# Altium PCB FS001.PcbDoc
Units mm, origin at the board's own origin, x right, y up, seen from the top; angles counter-clockwise.
Board outline 64 x 10 mm, 2 copper layers (Top Layer, Bottom Layer), stack 1.57 mm thick; 34 components, 35 nets, 134 pads, 15 vias.
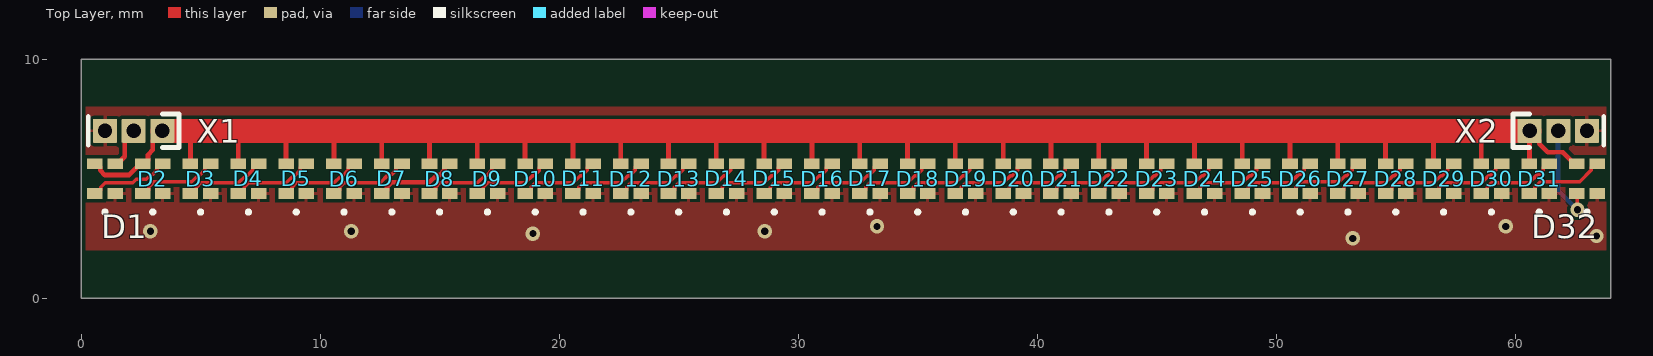
[diagram p0: Top Layer view]
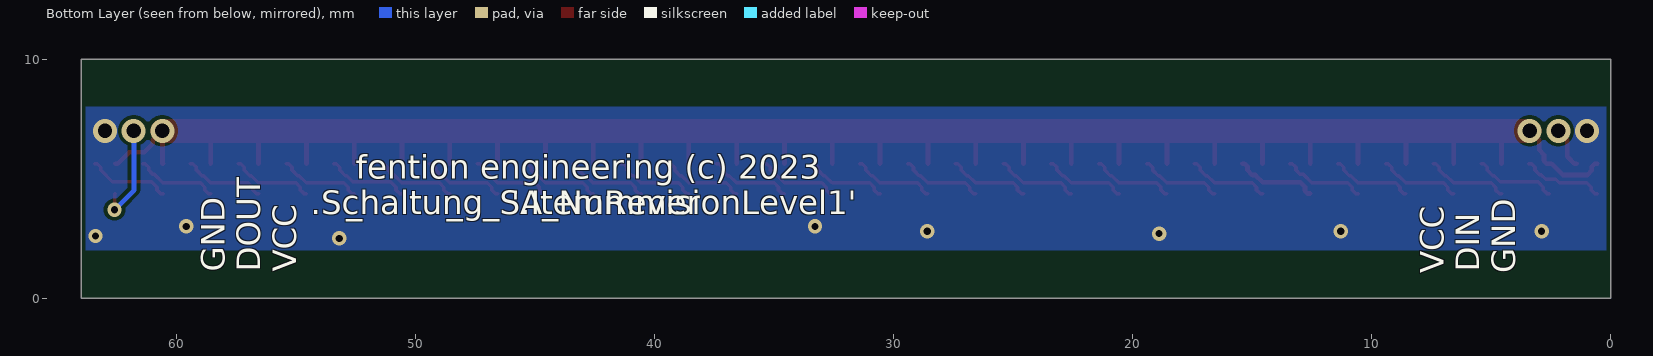
[diagram p1: Bottom Layer view, seen from below]
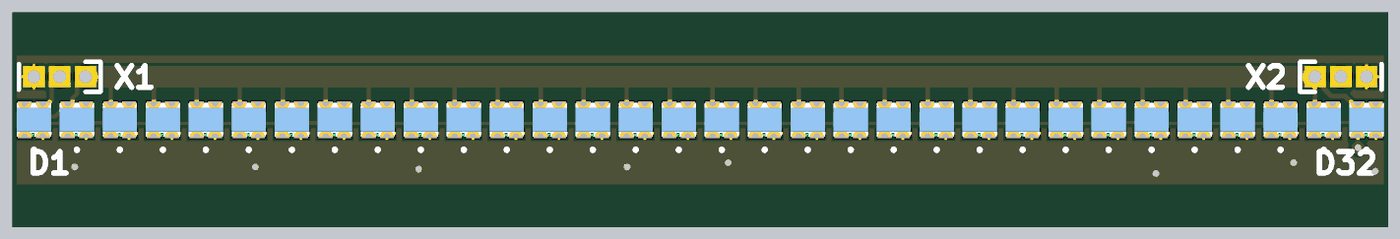
[diagram p2: 3D render of the assembled board from above, using the file's embedded part models]

## Layer stack, top to bottom
Top Solder: solder mask 0.0127, Solder Resist, Dk 3.8
Top Layer: signal copper 0.035
Dielectric: core 1.5, FR-4, Dk 4.5
Bottom Layer: signal copper 0.035
Bottom Solder: solder mask 0.0127, Solder Resist, Dk 3.8

## Board outline
0,10 64,10 64,0 0,0

## Design rules (kind name [scope] priority, off if disabled: settings)
BoardOutlineClearance [All] p1: gap=0.2 ignorepadtopadclearanceinfootprint=FALSE
Clearance [All] p1: gap=0.15 ignorepadtopadclearanceinfootprint=FALSE
ComponentClearance [All] p1: gap=0.127 collisioncheckmode=3 verticalgap=0.127 showdistances=TRUE
DiffPairsRouting [All] p1: maxlimit=0.254 minlimit=0.127 mostfreqgap=0.127 toplayer_minwidth=0.127 toplayer_maxwidth=25.4 toplayer_prefwidth=0.127 bottomlayer_minwidth=0.127 bottomlayer_maxwidth=25.4 bottomlayer_prefwidth=0.127 maxuncoupledlength=12.7
Height [All] p1: minheight=0 maxheight=1816.048 prefheight=12.7
HoleSize [All] p1: absolutevalues=TRUE maxlimit=6.3 minlimit=0.3 maxpercent=80.000 minpercent=20.000
HoleToHoleClearance [All] p1: gap=0.25 allowstackedmicrovias=FALSE
MinimumAnnularRing [All] p1: minimumring=0.076
MinimumSolderMaskSliver [All] p1: minsoldermaskwidth=0
PlaneClearance [All] p1: clearance=0.127
PlaneConnect PlaneConnectPowerPads [InPadClass('PowerPads')] p1: planeconnectstyle=Direct reliefexpansion=0.508 reliefentries=4 reliefconductorwidth=0.254 reliefairgap=0.254
PlaneConnect [All] p2: pad.planeconnectstyle=Relief pad.reliefexpansion=0.3 pad.reliefentries=4 pad.reliefconductorwidth=0.127 pad.reliefairgap=0.127 via.planeconnectstyle=Direct via.reliefexpansion=0.3 via.reliefentries=4 via.reliefconductorwidth=0.127 via.reliefairgap=0.127
PolygonConnect PolygonConnectPowerPads [All vs (InPadClass('PowerPads'))] p1: connectstyle=Direct reliefconductorwidth=0.254 reliefentries=4 polygonreliefangle="90 Angle" airgapwidth=0.254
PolygonConnect [All] p2: thpad.connectstyle=Relief thpad.reliefconductorwidth=0.127 thpad.reliefentries=4 thpad.polygonreliefangle="90 Angle" thpad.airgapwidth=0.127 smdpad.connectstyle=Relief smdpad.reliefconductorwidth=0.127 smdpad.reliefentries=4 smdpad.polygonreliefangle="90 Angle" smdpad.airgapwidth=0.127 via.connectstyle=Direct via.reliefconductorwidth=0.127 via.reliefentries=4 via.polygonreliefangle="90 Angle" via.airgapwidth=0.127
RoutingVias [All] p1: holewidth=0.3 width=0.6 viastyle="Through Hole" minholewidth=0.3 minwidth=0.6 maxholewidth=0.6 maxwidth=6.6
SilkToSilkClearance [All] p1: silktosilkclearance=0
SilkToSolderMaskClearance [IsPad] p1: minsilkscreentomaskgap=0.127 clearancetoexposedcopper=TRUE
SolderMaskExpansion [All] p1: expansion=0.075 istentingtop=FALSE
Width [All] p1: maxlimit=25.4 minlimit=0.15 preferedwidth=0.2 toplayer_prefwidth=0.15 bottomlayer_minwidth=0.2 minimp=50.000000 maximp=50.000000 favimp=50.000000
20 further rules are at their usual default settings.

## Classes and differential pairs
component class FS001: D3 D5 D8 D21 D31 D32 X1

## Components (designator, comment, footprint, x,y, rotation, side; value= is the part's Value field where it differs from the comment)
D1 "XINGLIGHT - XL-1615RGBC-WS2812B" "XINGLIGHT - XL1615RGBC-WS2812B" 1,5 r90 top value=RGB
D2 "XINGLIGHT - XL-1615RGBC-WS2812B" "XINGLIGHT - XL1615RGBC-WS2812B" 3,5 r90 top value=RGB
D3 "XINGLIGHT - XL-1615RGBC-WS2812B" "XINGLIGHT - XL1615RGBC-WS2812B" 5,5 r90 top value=RGB
D4 "XINGLIGHT - XL-1615RGBC-WS2812B" "XINGLIGHT - XL1615RGBC-WS2812B" 7,5 r90 top value=RGB
D5 "XINGLIGHT - XL-1615RGBC-WS2812B" "XINGLIGHT - XL1615RGBC-WS2812B" 9,5 r90 top value=RGB
D6 "XINGLIGHT - XL-1615RGBC-WS2812B" "XINGLIGHT - XL1615RGBC-WS2812B" 11,5 r90 top value=RGB
D7 "XINGLIGHT - XL-1615RGBC-WS2812B" "XINGLIGHT - XL1615RGBC-WS2812B" 13,5 r90 top value=RGB
D8 "XINGLIGHT - XL-1615RGBC-WS2812B" "XINGLIGHT - XL1615RGBC-WS2812B" 15,5 r90 top value=RGB
D9 "XINGLIGHT - XL-1615RGBC-WS2812B" "XINGLIGHT - XL1615RGBC-WS2812B" 17,5 r90 top value=RGB
D10 "XINGLIGHT - XL-1615RGBC-WS2812B" "XINGLIGHT - XL1615RGBC-WS2812B" 19,5 r90 top value=RGB
D11 "XINGLIGHT - XL-1615RGBC-WS2812B" "XINGLIGHT - XL1615RGBC-WS2812B" 21,5 r90 top value=RGB
D12 "XINGLIGHT - XL-1615RGBC-WS2812B" "XINGLIGHT - XL1615RGBC-WS2812B" 23,5 r90 top value=RGB
D13 "XINGLIGHT - XL-1615RGBC-WS2812B" "XINGLIGHT - XL1615RGBC-WS2812B" 25,5 r90 top value=RGB
D14 "XINGLIGHT - XL-1615RGBC-WS2812B" "XINGLIGHT - XL1615RGBC-WS2812B" 27,5 r90 top value=RGB
D15 "XINGLIGHT - XL-1615RGBC-WS2812B" "XINGLIGHT - XL1615RGBC-WS2812B" 29,5 r90 top value=RGB
D16 "XINGLIGHT - XL-1615RGBC-WS2812B" "XINGLIGHT - XL1615RGBC-WS2812B" 31,5 r90 top value=RGB
D17 "XINGLIGHT - XL-1615RGBC-WS2812B" "XINGLIGHT - XL1615RGBC-WS2812B" 33,5 r90 top value=RGB
D18 "XINGLIGHT - XL-1615RGBC-WS2812B" "XINGLIGHT - XL1615RGBC-WS2812B" 35,5 r90 top value=RGB
D19 "XINGLIGHT - XL-1615RGBC-WS2812B" "XINGLIGHT - XL1615RGBC-WS2812B" 37,5 r90 top value=RGB
D20 "XINGLIGHT - XL-1615RGBC-WS2812B" "XINGLIGHT - XL1615RGBC-WS2812B" 39,5 r90 top value=RGB
D21 "XINGLIGHT - XL-1615RGBC-WS2812B" "XINGLIGHT - XL1615RGBC-WS2812B" 41,5 r90 top value=RGB
D22 "XINGLIGHT - XL-1615RGBC-WS2812B" "XINGLIGHT - XL1615RGBC-WS2812B" 43,5 r90 top value=RGB
D23 "XINGLIGHT - XL-1615RGBC-WS2812B" "XINGLIGHT - XL1615RGBC-WS2812B" 45,5 r90 top value=RGB
D24 "XINGLIGHT - XL-1615RGBC-WS2812B" "XINGLIGHT - XL1615RGBC-WS2812B" 47,5 r90 top value=RGB
D25 "XINGLIGHT - XL-1615RGBC-WS2812B" "XINGLIGHT - XL1615RGBC-WS2812B" 49,5 r90 top value=RGB
D26 "XINGLIGHT - XL-1615RGBC-WS2812B" "XINGLIGHT - XL1615RGBC-WS2812B" 51,5 r90 top value=RGB
D27 "XINGLIGHT - XL-1615RGBC-WS2812B" "XINGLIGHT - XL1615RGBC-WS2812B" 53,5 r90 top value=RGB
D28 "XINGLIGHT - XL-1615RGBC-WS2812B" "XINGLIGHT - XL1615RGBC-WS2812B" 55,5 r90 top value=RGB
D29 "XINGLIGHT - XL-1615RGBC-WS2812B" "XINGLIGHT - XL1615RGBC-WS2812B" 57,5 r90 top value=RGB
D30 "XINGLIGHT - XL-1615RGBC-WS2812B" "XINGLIGHT - XL1615RGBC-WS2812B" 59,5 r90 top value=RGB
D31 "XINGLIGHT - XL-1615RGBC-WS2812B" "XINGLIGHT - XL1615RGBC-WS2812B" 61,5 r90 top value=RGB
D32 "XINGLIGHT - XL-1615RGBC-WS2812B" "XINGLIGHT - XL1615RGBC-WS2812B" 63,5 r90 top value=RGB
X1 "Pogo Pads 3-Pin" "Pogo Pads 3-Pin" 2.2,7 r180 top value="1x3 Pin"
X2 "Pogo Pads 3-Pin" "Pogo Pads 3-Pin" 61.8,7 r0 top value="1x3 Pin"

## Footprints (in the part's own frame and the unit in brackets; to place one, negate y for a bottom-side part, rotate by r counter-clockwise, add the part's x,y. Pads: shape width x height; smd on the part's side, far side on the other; paste and mask are expansions set on the pad)
"Pogo Pads 3-Pin" [mm] "Pads for contacting via spring loaded pogo contacts"
  rrect5% 1x1 smd paste-10 mask+0: 1(-1.2,0) 2(0,0) 3(1.2,0)
  silkscreen extent -1.9,-0.7 1.9,0.7
"XINGLIGHT - XL1615RGBC-WS2812B" [mm] "Adressable RGB LED in 1615 enclosure"
  rect 0.45x0.65 smd: 1(-0.625,0.425) 2(0.625,0.425) 3(-0.625,-0.425) 4(0.625,-0.425)
  silkscreen extent -1.47,-0.08 -1.33,0.07, body extent -0.8,-0.8 0.8,0.8, height 0.7

## Part data
D1 D2 D3 D4 D5 D6 D7 D8 D9 D10 D11 D12 D13 D14 D15 D16 D17 D18 D19 D20 D21 D22 D23 D24 D25 D26 D27 D28 D29 D30 D31 D32: library part CMP-007-00017-3, "Adressable RGB LED in 1615 enclosure", Colour=RGB, Forward Current=15mA, Forward Voltage=5.5V, JLCPCB/LCSC-Nr.=C5349954, Manufacturer=XINGLIGHT, Package="0606 (1615x06)", Temperature max.=150°C, Temperature min.=-40°C, AEC-Q102 Compliant=No, ComponentLink1Description=Datasheet, ComponentLink1URL=https://datasheet.lcsc.com/lcsc/2301111010_XINGLIGHT-XL-1615RGBC-WS2812B_C5349954.pdf, General="LED - Package - Colour", Material-Classification=M3, Mounting Style=SMT, Order Number=XL-1615RGBC-WS2812B, Pins=2, RoHS Compliant=yes, Wavelength=0mm
X1 X2: library part CMP-022-00007-4, "Pads for contacting via spring loaded pogo contacts", Manufacturer=NONE, Package="PCB printed", Temperature max.=120°C, Temperature min.=-40°C, General="Pogo Pads", Material-Classification=M3, Mounting Style="PCB printed", Order Number=NONE, Pins=3, RoHS Compliant=yes

## Via types
v1: diameter 0.6, hole 0.3, Top Layer to Bottom Layer, tented both sides, 9 vias
v2: diameter 1, hole 0.6, Top Layer to Bottom Layer, 6 vias

## Nets (pads, with @x,y where several pads share a name; then routed paths per layer and width w, separated by ;. In a path a pad name is that pad's centre, name@x,y a point inside that pad or via, vN(x,y) a via of type N, cw(c..) or ccw(c..) an arc to the next point about the centre after c; other vN are vias at no path point)
DIN: D1.4 X1.2 | length 1.8
  Top Layer w0.2: D1.4 1.525,5.625 1.825,5.925 1.825,6.625 v2(2.2,7)
DOUT: D32.1 X2.2 | length 4.3
  Top Layer w0.15: D32.1 62.6,4.35 v1(62.6,3.7)
  Bottom Layer w0.2: v2(61.8,7) 61.783,6.983 61.783,4.517 v1(62.6,3.7)
GND: D1.3 D2.3 D3.3 D4.3 D5.3 D6.3 D7.3 D8.3 D9.3 D10.3 D11.3 D12.3 D13.3 D14.3 D15.3 D16.3 D17.3 D18.3 D19.3 D20.3 D21.3 D22.3 D23.3 D24.3 D25.3 D26.3 D27.3 D28.3 D29.3 D30.3 D31.3 D32.3 X1.3 X2.3
  other v1: 53.2,2.5 63.4,2.6 18.9,2.7 2.9,2.8 11.3,2.8 28.6,2.8 33.3,3 59.6,3
  other v2: 1,7 63,7
NetD1_1: D1.1 D2.4 | length 3.5
  Top Layer w0.15: D1.1 0.675,4.375 0.825,4.525 0.825,4.643 1.007,4.825 2.157,4.825 2.307,4.975 2.733,4.975 2.923,5.166 2.984,5.166 3.175,5.357 3.175,5.475 3.325,5.625 D2.4
NetD2_1: D2.1 D3.4 | length 3.5
  Top Layer w0.15: D2.1 2.675,4.375 2.825,4.525 2.825,4.643 3.048,4.866 4.623,4.866 4.883,5.125 4.943,5.125 5.175,5.357 5.175,5.475 5.325,5.625 D3.4
NetD3_1: D3.1 D4.4 | length 3.5
  Top Layer w0.15: D3.1 4.675,4.375 4.825,4.525 4.825,4.643 5.007,4.825 6.583,4.825 6.883,5.125 6.943,5.125 7.175,5.357 7.175,5.475 7.325,5.625 D4.4
NetD4_1: D4.1 D5.4 | length 3.5
  Top Layer w0.15: D4.1 6.675,4.375 6.825,4.525 6.825,4.643 7.007,4.825 8.583,4.825 8.883,5.125 8.943,5.125 9.175,5.357 9.175,5.475 9.325,5.625 D5.4
NetD5_1: D5.1 D6.4 | length 3.5
  Top Layer w0.15: D5.1 8.675,4.375 8.825,4.525 8.825,4.643 9.007,4.825 10.583,4.825 10.883,5.125 10.943,5.125 11.175,5.357 11.175,5.475 11.325,5.625 D6.4
NetD6_1: D6.1 D7.4 | length 3.5
  Top Layer w0.15: D6.1 10.675,4.375 10.825,4.525 10.825,4.643 11.007,4.825 12.512,4.825 12.862,5.175 12.993,5.175 13.175,5.357 13.175,5.475 13.325,5.625 D7.4
NetD7_1: D7.1 D8.4 | length 3.5
  Top Layer w0.2: D7.1 12.675,4.375 12.8,4.5 12.8,4.654 12.996,4.85 14.572,4.85 14.872,5.15 15.004,5.15 15.2,5.346 15.2,5.5 15.325,5.625 D8.4
NetD8_1: D8.1 D9.4 | length 3.5
  Top Layer w0.15: D8.1 14.675,4.375 14.825,4.525 14.825,4.643 15.007,4.825 16.583,4.825 16.883,5.125 16.943,5.125 17.175,5.357 17.175,5.475 17.325,5.625 D9.4
NetD9_1: D9.1 D10.4 | length 3.5
  Top Layer w0.15: D9.1 16.675,4.375 16.825,4.525 16.825,4.643 17.007,4.825 18.583,4.825 18.883,5.125 18.943,5.125 19.175,5.357 19.175,5.475 19.325,5.625 D10.4
NetD10_1: D10.1 D11.4 | length 3.5
  Top Layer w0.15: D10.1 18.675,4.375 18.825,4.525 18.825,4.643 19.007,4.825 20.583,4.825 20.883,5.125 20.943,5.125 21.175,5.357 21.175,5.475 21.325,5.625 D11.4
NetD11_1: D11.1 D12.4 | length 3.5
  Top Layer w0.15: D11.1 20.675,4.375 20.825,4.525 20.825,4.643 21.007,4.825 22.583,4.825 22.883,5.125 22.943,5.125 23.175,5.357 23.175,5.475 23.325,5.625 D12.4
NetD12_1: D12.1 D13.4 | length 3.5
  Top Layer w0.15: D12.1 22.675,4.375 22.825,4.525 22.825,4.643 23.007,4.825 24.583,4.825 24.883,5.125 24.943,5.125 25.175,5.357 25.175,5.475 25.325,5.625 D13.4
NetD13_1: D13.1 D14.4 | length 3.5
  Top Layer w0.15: D13.1 24.675,4.375 24.825,4.525 24.825,4.643 25.007,4.825 26.583,4.825 26.883,5.125 26.943,5.125 27.175,5.357 27.175,5.475 27.325,5.625 D14.4
NetD14_1: D14.1 D15.4 | length 3.5
  Top Layer w0.15: D14.1 26.675,4.375 26.825,4.525 26.825,4.643 27.007,4.825 28.583,4.825 28.883,5.125 28.943,5.125 29.175,5.357 29.175,5.475 29.325,5.625 D15.4
NetD15_1: D15.1 D16.4 | length 3.5
  Top Layer w0.15: D15.1 28.675,4.375 28.825,4.525 28.825,4.643 29.007,4.825 30.583,4.825 30.883,5.125 30.943,5.125 31.175,5.357 31.175,5.475 31.325,5.625 D16.4
NetD16_1: D16.1 D17.4 | length 3.5
  Top Layer w0.15: D16.1 30.675,4.375 30.825,4.525 30.825,4.643 31.007,4.825 32.583,4.825 32.883,5.125 32.943,5.125 33.175,5.357 33.175,5.475 33.325,5.625 D17.4
NetD17_1: D17.1 D18.4 | length 3.5
  Top Layer w0.15: D17.1 32.675,4.375 32.825,4.525 32.825,4.643 33.007,4.825 34.583,4.825 34.883,5.125 34.943,5.125 35.175,5.357 35.175,5.475 35.325,5.625 D18.4
NetD18_1: D18.1 D19.4 | length 3.5
  Top Layer w0.15: D18.1 34.675,4.375 34.825,4.525 34.825,4.643 35.007,4.825 36.583,4.825 36.883,5.125 36.943,5.125 37.175,5.357 37.175,5.475 37.325,5.625 D19.4
NetD19_1: D19.1 D20.4 | length 3.5
  Top Layer w0.15: D19.1 36.675,4.375 36.825,4.525 36.825,4.643 37.007,4.825 38.583,4.825 38.883,5.125 38.943,5.125 39.175,5.357 39.175,5.475 39.325,5.625 D20.4
NetD20_1: D20.1 D21.4 | length 3.5
  Top Layer w0.15: D20.1 38.675,4.375 38.825,4.525 38.825,4.643 39.007,4.825 40.583,4.825 40.883,5.125 40.943,5.125 41.175,5.357 41.175,5.475 41.325,5.625 D21.4
NetD21_1: D21.1 D22.4 | length 3.5
  Top Layer w0.15: D21.1 40.675,4.375 40.825,4.525 40.825,4.643 41.007,4.825 42.583,4.825 42.883,5.125 42.943,5.125 43.175,5.357 43.175,5.475 43.325,5.625 D22.4
NetD22_1: D22.1 D23.4 | length 3.5
  Top Layer w0.15: D22.1 42.675,4.375 42.825,4.525 42.825,4.643 43.007,4.825 44.583,4.825 44.883,5.125 44.943,5.125 45.175,5.357 45.175,5.475 45.325,5.625 D23.4
NetD23_1: D23.1 D24.4 | length 3.5
  Top Layer w0.15: D23.1 44.675,4.375 44.825,4.525 44.825,4.643 45.007,4.825 46.583,4.825 46.883,5.125 46.943,5.125 47.175,5.357 47.175,5.475 47.325,5.625 D24.4
NetD24_1: D24.1 D25.4 | length 3.5
  Top Layer w0.15: D24.1 46.675,4.375 46.825,4.525 46.825,4.643 47.007,4.825 48.583,4.825 48.883,5.125 48.943,5.125 49.175,5.357 49.175,5.475 49.325,5.625 D25.4
NetD25_1: D25.1 D26.4 | length 3.5
  Top Layer w0.15: D25.1 48.675,4.375 48.825,4.525 48.825,4.643 49.007,4.825 50.583,4.825 50.933,5.175 50.993,5.175 51.175,5.357 51.175,5.475 51.325,5.625 D26.4
NetD26_1: D26.1 D27.4 | length 3.5
  Top Layer w0.15: D26.1 50.675,4.375 50.825,4.525 50.825,4.643 51.057,4.875 52.633,4.875 52.883,5.125 52.943,5.125 53.175,5.357 53.175,5.475 53.325,5.625 D27.4
NetD27_1: D27.1 D28.4 | length 3.5
  Top Layer w0.15: D27.1 52.675,4.375 52.825,4.525 52.825,4.643 53.007,4.825 54.583,4.825 54.883,5.125 54.943,5.125 55.175,5.357 55.175,5.475 55.325,5.625 D28.4
NetD28_1: D28.1 D29.4 | length 3.5
  Top Layer w0.15: D28.1 54.675,4.375 54.825,4.525 54.825,4.643 55.007,4.825 56.583,4.825 56.883,5.125 56.943,5.125 57.175,5.357 57.175,5.475 57.325,5.625 D29.4
NetD29_1: D29.1 D30.4 | length 3.5
  Top Layer w0.15: D29.1 56.675,4.375 56.825,4.525 56.825,4.643 57.007,4.825 58.583,4.825 58.883,5.125 58.943,5.125 59.175,5.357 59.175,5.475 59.325,5.625 D30.4
NetD30_1: D30.1 D31.4 | length 3.5
  Top Layer w0.15: D30.1 58.675,4.375 58.825,4.525 58.825,4.643 59.007,4.825 60.583,4.825 60.933,5.175 60.993,5.175 61.175,5.357 61.175,5.475 61.325,5.625 D31.4
NetD31_1: D31.1 D32.4 | length 3.5
  Top Layer w0.15: D31.1 60.675,4.375 60.825,4.525 60.825,4.643 61.057,4.875 62.693,4.875 63.175,5.357 63.175,5.475 63.325,5.625 D32.4
VCC: D1.2 D2.2 D3.2 D4.2 D5.2 D6.2 D7.2 D8.2 D9.2 D10.2 D11.2 D12.2 D13.2 D14.2 D15.2 D16.2 D17.2 D18.2 D19.2 D20.2 D21.2 D22.2 D23.2 D24.2 D25.2 D26.2 D27.2 D28.2 D29.2 D30.2 D31.2 D32.2 X1.1 X2.1 | length 104.7
  Top Layer w0.2: D1.2 0.675,5.625 0.8,5.5 0.8,5.346 0.996,5.15 2,5.15 2.475,5.625 2.675,5.625 2.8,5.75 2.8,6 3,6.2 3,6.6 v2(3.4,7) ; D3.2 4.575,6.975 4.6,7 ; D4.2 6.575,6.975 6.6,7 ; 8.4,7 8.575,6.825 D5.2 ; D6.2 10.575,6.975 10.6,7 ; 12.5,7 12.575,6.925 D7.2 ; D8.2 14.575,6.975 14.6,7 ; 16.5,7 16.575,6.925 D9.2 ; 18.5,7 18.575,6.925 D10.2 ; D11.2 20.575,6.975 20.6,7 ; D12.2 22.575,6.975 22.6,7 ; D13.2 24.575,6.975 24.6,7 ; D14.2 26.575,6.975 26.6,7 ; D15.2 28.575,6.975 28.6,7 ; D16.2 30.575,6.875 30.7,7 ; D17.2 32.575,6.875 32.7,7 ; D18.2 34.575,6.975 34.6,7 ; D19.2 36.575,6.975 36.6,7 ; D20.2 38.575,6.875 38.7,7 ; D21.2 40.575,6.975 40.6,7 ; D22.2 42.575,6.975 42.6,7 ; 44.5,7 44.575,6.925 D23.2 ; D24.2 46.575,6.975 46.6,7 ; D25.2 48.575,6.875 48.7,7 ; 50.5,7 50.575,6.925 D26.2 ; D27.2 52.575,6.975 52.6,7 ; D28.2 54.575,6.875 54.7,7 ; 56.4,7 56.575,6.825 D29.2 ; D30.2 58.575,6.975 58.6,7 ; D31.2 60.6,5.65 v2(60.6,7) 61,6.6 61,6.461 61.356,6.106 61.994,6.106 62.475,5.625 D32.2
  Top Layer w1: v2(3.4,7) 4.6,7 6.6,7 8.4,7 10.6,7 12.5,7 14.6,7 16.5,7 18.5,7 20.6,7 22.6,7 24.6,7 26.6,7 28.6,7 30.7,7 32.7,7 34.6,7 36.6,7 38.7,7 40.6,7 42.6,7 44.5,7 46.6,7 48.7,7 50.5,7 52.6,7 54.7,7 56.4,7 58.6,7 v2(60.6,7)

## Polygon pours and split planes (outlines as drawn)
GND on Top Layer "GND_TOP" (solid, pour order 0): -1,8 65,8 65,2 -1,2
GND on Bottom Layer "GND_BOT" (solid, pour order 1): -2,8 66,8 66,2 -2,2

## Silkscreen, mask and mechanical layers (free items; w line width, h text height)
Bottom Overlay:
  text "fention engineering (c) 2023" at 52.5,5 h1
  text "'.ItemRevisionLevel1'" at 46,3.5 h1
  text "_" at 48.7,3.5 h1
  text "_" at 52.898,3.5 h1
  text ".Schaltung_SA_Nummer" at 54.398,3.5 h1
  text "DIN" at 5.5,1.102 h1 r270
  text "VCC" at 55,1.102 h1 r270
  text "DOUT" at 56.5,1.102 h1 r270
  text "GND" at 58,1.102 h1 r270
  text "GND" at 4,1.051 h1 r270
  text "VCC" at 7,1.051 h1 r270
Outline:
  the board outline again, w0.2